# EAGLE board tur_lgh_uLM350 (EAGLE 5.10)
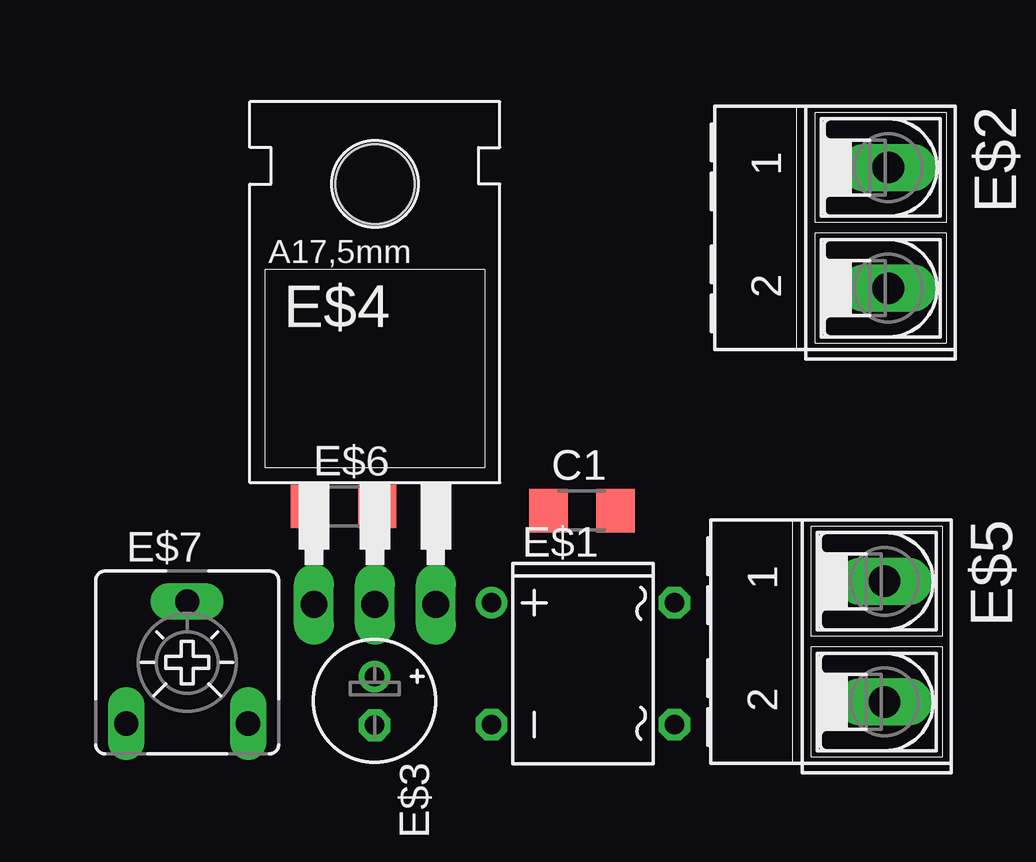
[diagram p0: board, top side]
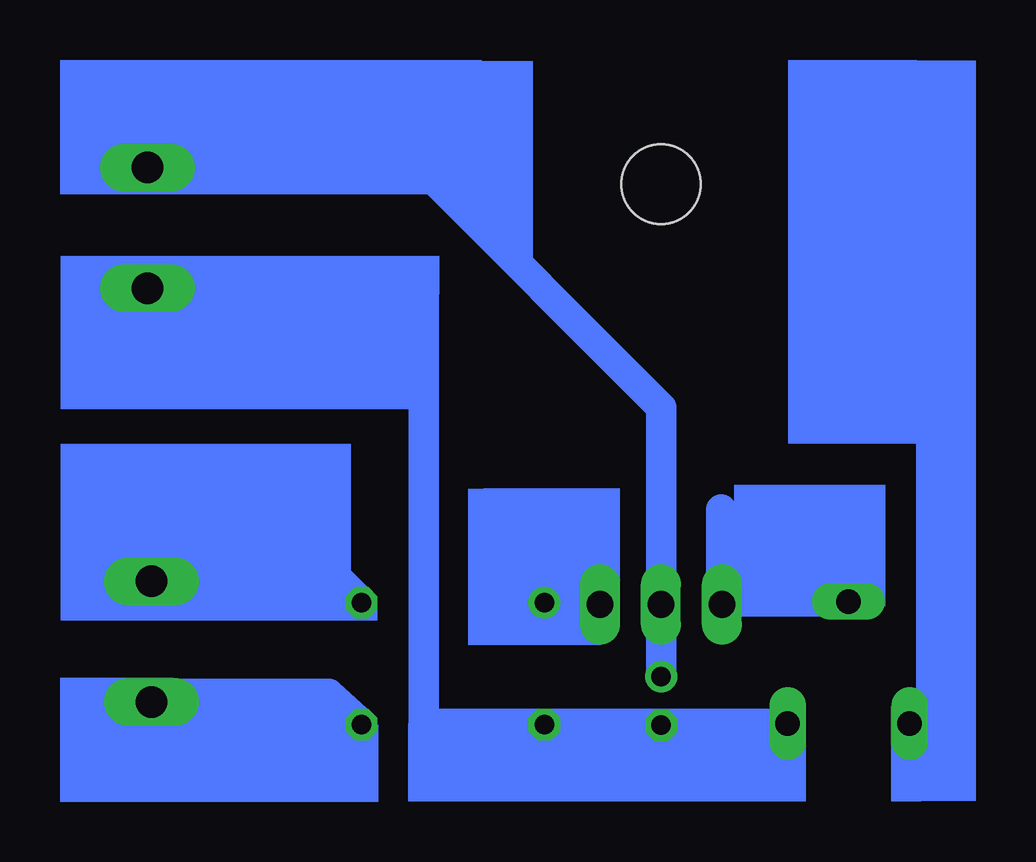
[diagram p1: board, bottom side, seen from below]

No outline drawn. Coordinates in mm, seen from the top.
Copper layers (1*16): Top 0.035mm / dielectric 1.5mm / Bottom 0.035mm
Design rules "default": minimum track width 10mil, minimum drill 24mil, track to track 8mil, track to pad 8mil, pad to pad 8mil, via to via 8mil, smd to smd 8mil, copper to edge 40mil, drill to drill 8mil, minimum pad ring 10mil, minimum via ring 8mil, stop-mask expansion 4mil, vias tented up to drill 0mil, thermal gap 10mil

## Footprints (pad centres in the part's own frame; a part is rotated, then mirrored left to right if it is on the bottom)
PT1206 = smd 1.6 x 1: 1A -1.4,-0.4; 1B -1.4,0.4; 2A 1.4,-0.4; 2B 1.4,0.4
DB = drill 0.813 round: + -2.54,-3.81 | drill 0.813 octagon: - 2.54,-3.81; AC1 2.54,3.81; AC2 -2.54,3.81
AK500/2-H = drill 1.321 long: 1 -2.515,0; 2 2.515,0
E2-5 = drill 0.813 pad 1.27 round: + -1.016,0 | drill 0.813 pad 1.27 octagon: - 1.016,0
TO220 = drill 1.118 long: 1 -2.54,-6.35; 2 0,-6.35; 3 2.54,-6.35 | hole 3.302: 0,11.176
CA6V = drill 1.016 long: A -2.54,-2.54; E 2.54,-2.54; S 0,2.54

## Placement (x,y rotation side)
C1  0.1 uF  [PT1206]  23.24,13.53 0 top
E$1  [DB]  23.28,7.15 270 top
E$2  [AK500/2-H]  36,25.32 270 top
E$3  [E2-5]  14.6,5.6 270 top
E$4  [TO220]  14.61,15.97 0 top
E$5  [AK500/2-H]  35.84,8.07 270 top
E$6  [PT1206]  13.31,13.71 0 top
E$7  [CA6V]  6.79,7.2 0 top

## Library data of the parts
C1 E$6 = sensor-heraeus
E$1 = rectifier
E$2 E$5 = con-ptr500
E$3 = ref-packages
E$4 = transistor-npn
E$7 = pot

## Tracks (layer width: path | path; a pad name or v marks a point on that pad's centre or on a via)
S$1
  Bottom 1.27: 35.89,10.61 27.98,10.61 27.11,9.74
S$2
  Bottom 1.27: 36.28,5.9 28.45,5.9 27.08,4.64
S$3
  Bottom 1.27: 14.6,6.66 14.6,9.78
S$4
  Bottom 1.27: 12.1,9.64 12.13,9.64
S$5
  Bottom 1.27: 14.62,9.68 14.59,9.68 14.59,13.66 | 12.1,9.61 12.1,13.59
S$6
  Bottom 1.27: 19.46,9.66 21.88,9.66 21.88,13.59
S$7
  Bottom 1.27: 19.61,9.66 17.22,9.66
S$8
  Bottom 1.27: 24.5,13.64 24.5,4.64 9.35,4.64 9.35,4.66
S$9
  Bottom 1.27: 6.74,9.74 12.16,9.74
S$10
  Bottom 1.27: 36,22.78 24.49,22.78 24.49,12.72
S$11
  Bottom 1.27: 36,27.87 24.62,27.87 14.59,17.84 14.59,11.95
(copper drawn outside any net)
  shapes: Bottom area x22